# Altium PCB PMS.PcbDoc (part 1 of 3)
Units mm, origin at the board's own origin, x right, y up, seen from the top; angles counter-clockwise.
Board outline 23.9 x 83.5 mm, 4 copper layers (Top Layer, Mid Layer 1, Mid Layer 2, Bottom Layer), stack 0.77 mm thick; 91 components, 62 nets, 411 pads, 218 vias.
Unrouted connection lines stored in the file: 98.
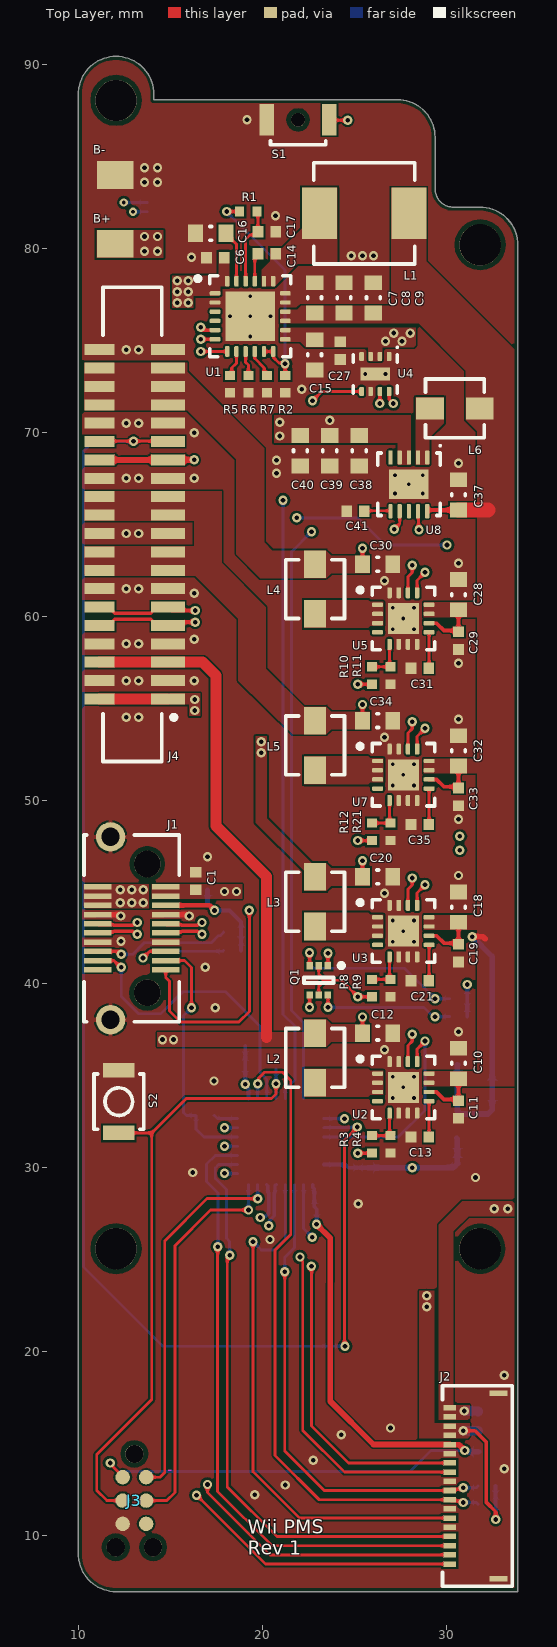
[diagram p0: Top Layer view]
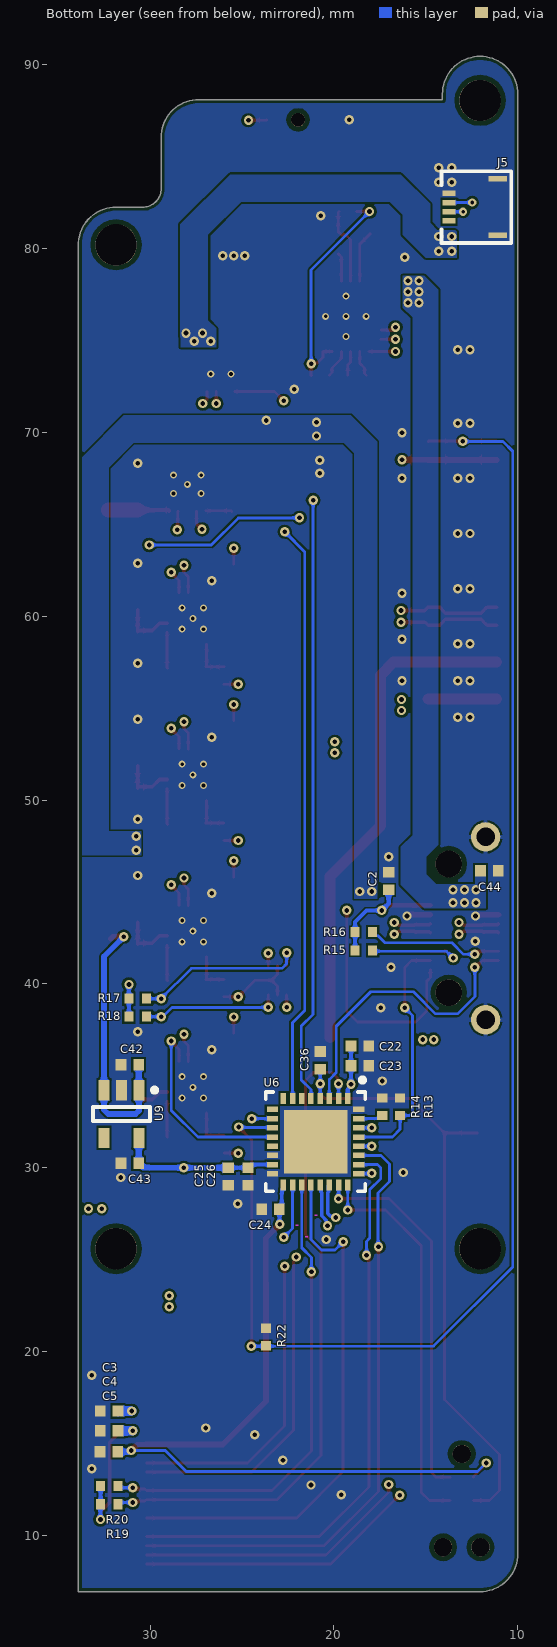
[diagram p1: Bottom Layer view, seen from below]
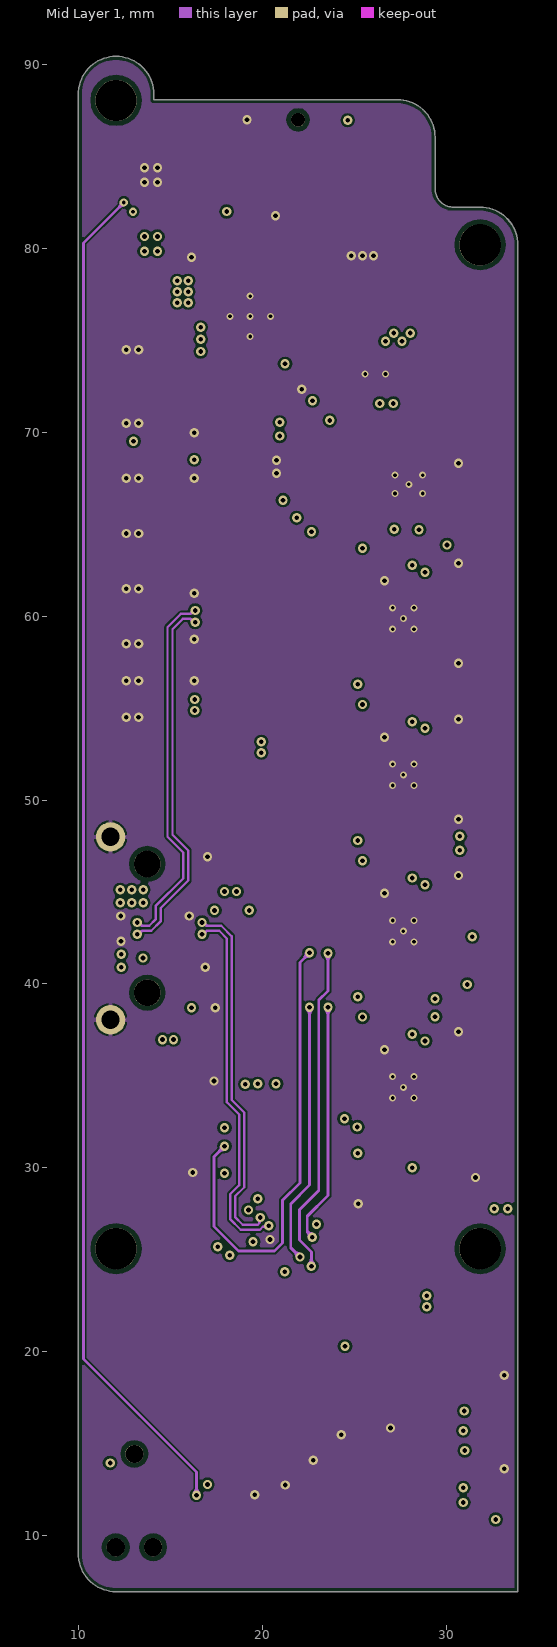
[diagram p2: Mid Layer 1]
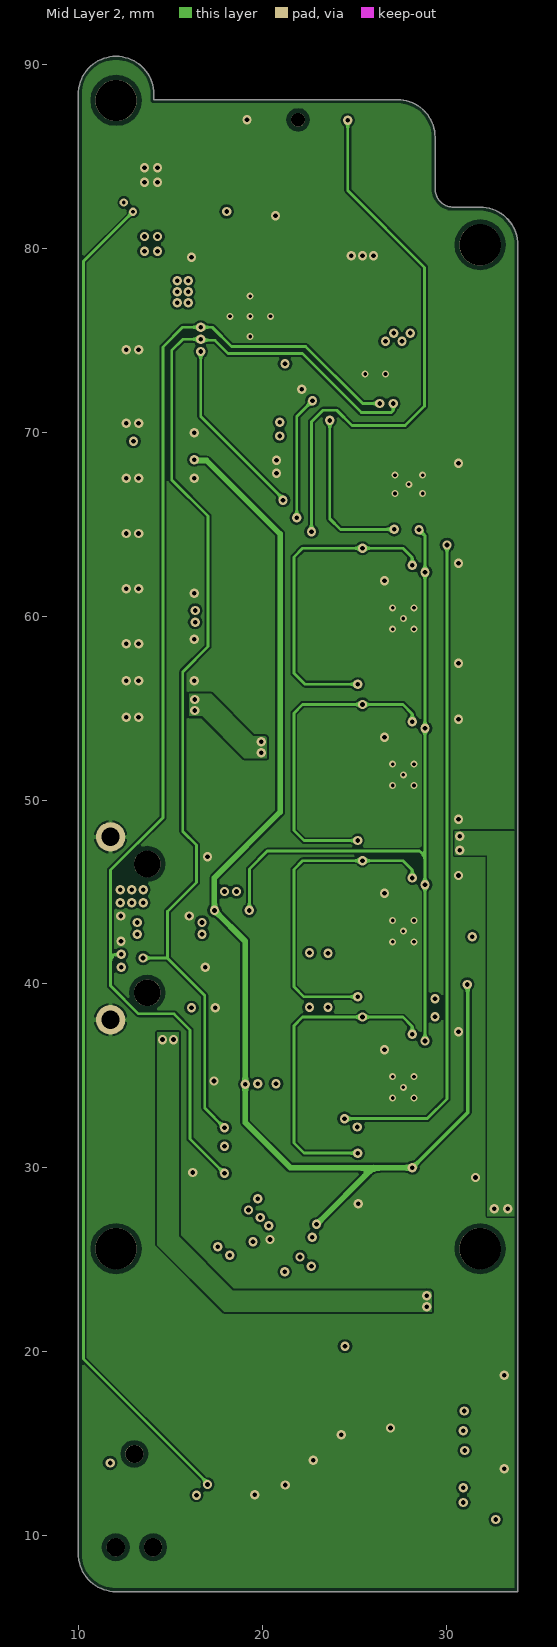
[diagram p3: Mid Layer 2]
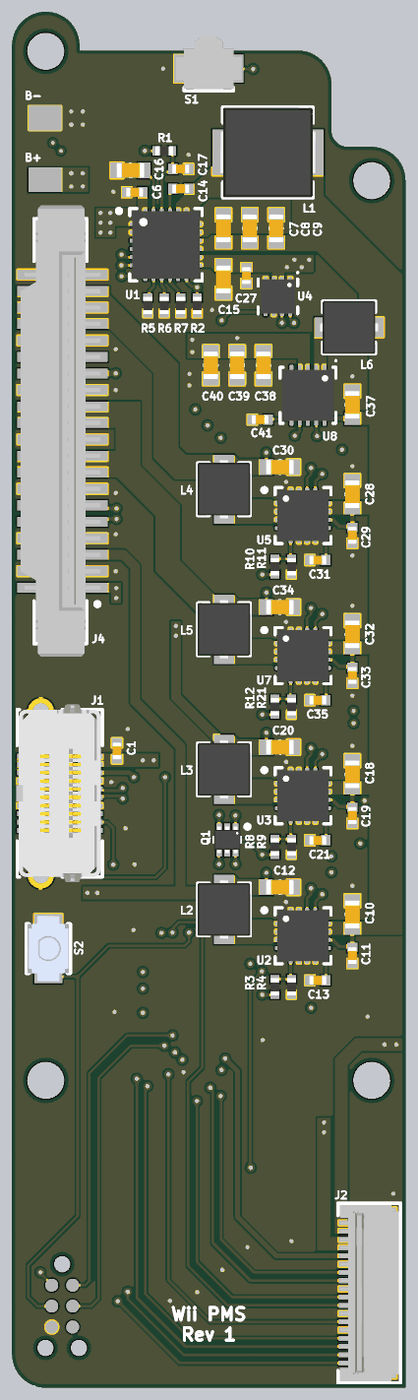
[diagram p5: 3D render of the assembled board from above, using the file's embedded part models]
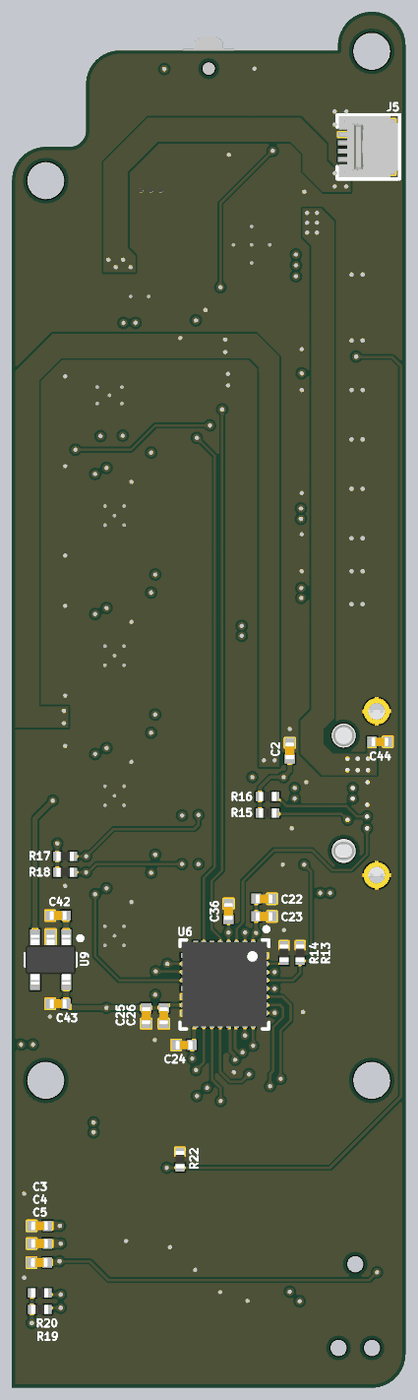
[diagram p6: 3D render of the assembled board from below, using the file's embedded part models]

## Layer stack, top to bottom
Top Solder: solder mask 0.0127, Solder Resist, Dk 3.8
Top Layer: signal copper 0.035
Dielectric 1: prepreg 0.2, 7628, Dk 4.6
Mid Layer 1: signal copper 0.0175
Core: core 0.265, FR-4, Dk 4.5
Mid Layer 2: signal copper 0.0175
Dielectric 2: prepreg 0.2, 7628, Dk 4.6
Bottom Layer: signal copper 0.035
Bottom Solder: solder mask 0.0127, Solder Resist, Dk 3.8

## Board outline
10,9 10,88.4 cw(c12.05,88.4) 12.05,90.45 cw(c12.05,88.4) 14.1,88.4 14.1,88.1 27.35,88.1 cw(c27.35,86.05) 29.4,86.05 29.4,83.25 ccw(c30.4,83.25) 30.4,82.25 31.85,82.25 cw(c31.85,80.2) 33.9,80.2 33.9,6.95 12.05,6.95 cw(c12.05,9)

## Design rules (kind name [scope] priority, off if disabled: settings)
BoardOutlineClearance [All] p1: gap=0.2 ignorepadtopadclearanceinfootprint=FALSE
Clearance [All] p1: gap=0.102 ignorepadtopadclearanceinfootprint=FALSE except(0.127: Arc-Via Track-Via SMDPad-Via THPad-Via Via-Via Via-Fill Via-Poly Via-Region Via-Text; 0.25: Arc-Hole Track-Hole SMDPad-Hole THPad-Hole Via-Hole Fill-Hole Poly-Hole Region-Hole Text-Hole)
ComponentClearance [All] p1: gap=0.102 collisioncheckmode=3 verticalgap=0.102 showdistances=TRUE
DiffPairsRouting DiffPairsRouting_USB [InDifferentialPair('MCU_DATA') OR InDifferentialPair('WII_DATA')] p1: maxlimit=0.254 minlimit=0.127 mostfreqgap=0.145 toplayer_prefgap=0.127 toplayer_minwidth=0.189 toplayer_maxwidth=0.381 toplayer_prefwidth=0.189 midlayer1_mingap=0.145 midlayer1_minwidth=0.127 midlayer1_maxwidth=0.381 midlayer1_prefwidth=0.127 midlayer2_mingap=0.145 midlayer2_minwidth=0.127 midlayer2_maxwidth=0.381 midlayer2_prefwidth=0.127 bottomlayer_prefgap=0.127 bottomlayer_minwidth=0.189 bottomlayer_maxwidth=0.381 bottomlayer_prefwidth=0.189 impedanceprofiledriven=TRUE impedanceprofileid={65FA5541-1460-4D6F-89CA-6EE92A77B4F4} impedanceprofilevalue=90.000000 maxuncoupledlength=12.7
DiffPairsRouting [All] p2: maxlimit=0.102 minlimit=0.102 mostfreqgap=0.102 toplayer_minwidth=0.102 toplayer_maxwidth=1816.048 toplayer_prefwidth=0.102 midlayer1_minwidth=0.102 midlayer1_maxwidth=1816.048 midlayer1_prefwidth=0.102 midlayer2_minwidth=0.102 midlayer2_maxwidth=1816.048 midlayer2_prefwidth=0.102 bottomlayer_minwidth=0.102 bottomlayer_maxwidth=1816.048 bottomlayer_prefwidth=0.102 maxuncoupledlength=12.7
Height [All] p1: minheight=0 maxheight=1816.048 prefheight=12.7
HoleSize [All] p1: absolutevalues=TRUE maxlimit=6.3 minlimit=0.2 maxpercent=80.000 minpercent=20.000
HoleToHoleClearance [All] p1: gap=0.25 allowstackedmicrovias=FALSE
MinimumAnnularRing [All] p1: minimumring=0.076
MinimumSolderMaskSliver [All] p1: minsoldermaskwidth=0
PlaneClearance [All] p1: clearance=0.102
PlaneConnect PlaneConnectPowerPads [InPadClass('PowerPads')] p1: planeconnectstyle=Direct reliefexpansion=0.508 reliefentries=4 reliefconductorwidth=0.254 reliefairgap=0.254
PlaneConnect [All] p2: pad.planeconnectstyle=Relief pad.reliefexpansion=0.3 pad.reliefentries=4 pad.reliefconductorwidth=0.102 pad.reliefairgap=0.102 via.planeconnectstyle=Direct via.reliefexpansion=0.3 via.reliefentries=4 via.reliefconductorwidth=0.127 via.reliefairgap=0.127
PolygonConnect PolygonConnect_PowerPads [All vs InComponent('J1') OR InComponent('U2') OR InComponent('U3') OR InComponent('U5') OR InComponent('U8') OR InComponent('U8') OR InComponent('U1') OR InComponent('J4')] p1 off: thpad.connectstyle=Relief thpad.reliefconductorwidth=0.254 thpad.reliefentries=4 thpad.polygonreliefangle="90 Angle" thpad.airgapwidth=0.254 smdpad.connectstyle=Direct smdpad.reliefconductorwidth=0.254 smdpad.reliefentries=4 smdpad.polygonreliefangle="90 Angle" smdpad.airgapwidth=0.254 via.connectstyle=Direct via.reliefconductorwidth=0.254 via.reliefentries=4 via.polygonreliefangle="90 Angle" via.airgapwidth=0.254
PolygonConnect PolygonConnect_Relief [All vs InNet('GND')] p2 off: connectstyle=Relief reliefconductorwidth=0.254 reliefentries=4 polygonreliefangle="90 Angle" airgapwidth=0.254
PolygonConnect [All] p3: thpad.connectstyle=Relief thpad.reliefconductorwidth=0.254 thpad.reliefentries=4 thpad.polygonreliefangle="90 Angle" thpad.airgapwidth=0.102 smdpad.connectstyle=Direct smdpad.reliefconductorwidth=0.254 smdpad.reliefentries=4 smdpad.polygonreliefangle="90 Angle" smdpad.airgapwidth=0.102 via.connectstyle=Direct via.reliefconductorwidth=0.127 via.reliefentries=4 via.polygonreliefangle="90 Angle" via.airgapwidth=0.127
RoutingVias [All] p1: holewidth=0.2 width=0.45 viastyle="Through Hole" minholewidth=0.2 minwidth=0.45 maxholewidth=6.3 maxwidth=6.55
SilkToSilkClearance [All] p1: silktosilkclearance=0
SilkToSolderMaskClearance [IsPad] p1: minsilkscreentomaskgap=0.102 clearancetoexposedcopper=TRUE
SolderMaskExpansion SolderMaskExpansion_Via [IsVia] p1: expansion=0.102 istentingtop=TRUE
SolderMaskExpansion [All] p2: expansion=0.075 istentingtop=FALSE
Width [All] p1: maxlimit=1816.048 minlimit=0.102 preferedwidth=0.102
20 further rules are at their usual default settings.

## Classes and differential pairs
polygon class Direct: 5V0_L01_P113
component class STM32: C22 C23 C24 C25 C26 C36 R13 R14 U6
component class MAX: C27 U4
component class BQ: C6 C7 C8 C9 C14 C15 C16 C17 L1 R1 R2 R5 R6 R7 U1
component class 3V3_AO: C42 C43 U9
component class 1V0: C32 C33 C34 C35 L5 R12 R21 U7
component class 5V0: C37 C38 C39 C40 C41 L6 U8
component class 1V15: C28 C29 C30 C31 L4 R10 R11 U5
component class 1V8: C18 C19 C20 C21 L3 R8 R9 U3
component class 3V3: C10 C11 C12 C13 L2 R3 R4 U2
differential pair WII_DATA: +WII_DATA_P -WII_DATA_N
differential pair MCU_DATA: +MCU_DATA_P -MCU_DATA_N

## Components (designator, comment, footprint, x,y, rotation, side; value= is the part's Value field where it differs from the comment)
B+ "Test Point" TP_RECTANGULAR_1.5X2MM 12,80.25 r90 top (schematic designator TP6)
B- "Test Point" TP_RECTANGULAR_1.5X2MM 12,84 r90 top (schematic designator TP7)
C1 "Capacitor" CAPC1005X06N 16.375,45.6 r270 top value=1uF
C2 "Capacitor" CAPC1005X06N 17.025,45.6 r270 bottom value=0.1uF
C3 "Capacitor" CAPC1005X06N 32.225,16.775 r180 bottom value=1uF
C4 "Capacitor" CAPC1005X06N 32.225,15.7 r180 bottom value=1uF
C5 "Capacitor" CAPC1005X06N 32.24,14.55 r180 bottom value=0.1uF
C6 "Capacitor" CAPC1005X06N 17.45,79.5 r0 top value=1uF
C7 "Capacitor" CAPC1608X09N 22.846,77.312 r270 top value=10uF
C8 "Capacitor" CAPC1608X09N 24.446,77.312 r270 top value=10uF
C9 "Capacitor" CAPC1608X09N 26.046,77.312 r270 top value=10uF
C10 "Capacitor" CAPC1608X09N 30.675,35.675 r270 top value=10uF
C11 "Capacitor" CAPC1005X06N 30.675,33.175 r90 top value=0.1uF
C12 "Capacitor" CAPC1608X09N 26.275,37.325 r180 top value=22uF
C13 "Capacitor" CAPC1005X06N 28.575,31.675 r0 top value=3300pF
C14 "Capacitor" CAPC1005X06N 20.247,79.712 r0 top value=47nF
C15 "Capacitor" CAPC1608X09N 22.846,74.212 r90 top value=10uF
C16 "Capacitor" CAPC1608X09N 17.2,80.825 r180 top value=6.8uF
C17 "Capacitor" CAPC1005X06N 20.247,80.912 r0 top value=4.7uF
C18 "Capacitor" CAPC1608X09N 30.675,44.175 r270 top value=10uF
C19 "Capacitor" CAPC1005X06N 30.675,41.675 r90 top value=0.1uF
C20 "Capacitor" CAPC1608X09N 26.275,45.825 r180 top value=22uF
C21 "Capacitor" CAPC1005X06N 28.575,40.175 r0 top value=3300pF
C22 "Capacitor" CAPC1005X06N 18.59,36.625 r0 bottom value=4.7uF
C23 "Capacitor" CAPC1005X06N 18.59,35.55 r0 bottom value=0.1uF
C24 "Capacitor" CAPC1005X06N 23.45,27.75 r180 bottom value=0.1uF
C25 "Capacitor" CAPC1005X06N 25.75,29.525 r90 bottom value=1uF
C26 "Capacitor" CAPC1005X06N 24.675,29.525 r90 bottom value=10nF
C27 "Capacitor" CAPC1005X06N 24.24,74.441 r90 top value=0.1uF
C28 "Capacitor" CAPC1608X09N 30.675,61.175 r270 top value=10uF
C29 "Capacitor" CAPC1005X06N 30.675,58.675 r90 top value=0.1uF
C30 "Capacitor" CAPC1608X09N 26.275,62.825 r180 top value=22uF
C31 "Capacitor" CAPC1005X06N 28.575,57.175 r0 top value=3300pF
C32 "Capacitor" CAPC1608X09N 30.675,52.675 r270 top value=10uF
C33 "Capacitor" CAPC1005X06N 30.675,50.175 r90 top value=0.1uF
C34 "Capacitor" CAPC1608X09N 26.275,54.325 r180 top value=22uF
C35 "Capacitor" CAPC1005X06N 28.575,48.675 r0 top value=3300pF
C36 "Capacitor" CAPC1005X06N 20.75,35.85 r270 bottom value=0.1uF
C37 "Capacitor" CAPC1608X09N 30.675,66.6 r270 top value=22uF
C38 "Capacitor" CAPC1608X09N 25.275,69 r90 top value=22uF
C39 "Capacitor" CAPC1608X09N 23.675,69 r90 top value=22uF
C40 "Capacitor" CAPC1608X09N 22.075,69 r90 top value=22uF
C41 "Capacitor" CAPC1005X06N 25.075,65.7 r0 top value=10nF
C42 "Capacitor" CAPC1005X06N 31.1,35.6 r180 bottom value=1uF
C43 "Capacitor" CAPC1005X06N 31.1,30.25 r180 bottom value=1uF
C44 "Capacitor" CAPC1005X06N 11.55,46.15 r0 bottom value=1uF
J1 "LSHM-110-04.0-L-DV-A-S-K-TR" LSHM-110-04.0-L-DV-A-S 12.9,43.025 r90 top
J2 "5034801800" 5034801800 31.7,12.7 r90 top
J3 "TC2030-NL" TC2030-NL 13.048,11.903 r270 top
J4 "2-1734248-0" 2-1734248-0 12.938,65 r270 top
J5 "5034800400" 5034800400 12.25,82.25 r90 bottom
L1 "IHLP2020CZER2R2M11" INDM5252X30N 25.546,81.912 r0 top
L2 "IHLP1212BZER2R2M11" INDM3030X20N 22.875,35.975 r90 top
L3 "IHLP1212BZER2R2M11" INDM3030X20N 22.875,44.475 r90 top
L4 "IHLP1212BZER2R2M11" INDM3030X20N 22.875,61.475 r90 top
L5 "IHLP1212BZER2R2M11" INDM3030X20N 22.875,52.975 r90 top
L6 "IHLP1212BZER1R0M11" INDM3030X20N 30.475,71.3 r180 top
Q1 "EM6K34T2CR" SOTFL50P160X50-6N 23.075,40.2 r270 top
R1 "Resistor" RESC1005X04N 19.246,82.012 r0 top value=10k
R2 "Resistor" RESC1005X04N 21.25,72.625 r270 top value=10k
R3 "Resistor" RESC1005X04N 25.975,31.275 r270 top value=324k
R4 "Resistor" RESC1005X04N 26.975,31.275 r90 top value=100k
R5 "Resistor" RESC1005X04N 18.25,72.625 r90 top value=10k
R6 "Resistor" RESC1005X04N 19.25,72.625 r90 top value=10k
R7 "Resistor" RESC1005X04N 20.25,72.625 r90 top value=165
R8 "Resistor" RESC1005X04N 25.975,39.775 r270 top value=127k
R9 "Resistor" RESC1005X04N 26.975,39.775 r90 top value=100k
R10 "Resistor" RESC1005X04N 25.975,56.775 r270 top value=45.3k
R11 "Resistor" RESC1005X04N 26.975,56.775 r90 top value=100k
R12 "Resistor" RESC1005X04N 25.975,48.275 r270 top value=30k
R13 "Resistor" RESC1005X04N 16.4,33.325 r270 bottom value=100k
R14 "Resistor" RESC1005X04N 17.375,33.325 r270 bottom value=10k
R15 "Resistor" RESC1005X04N 18.375,41.825 r0 bottom value=4.7k
R16 "Resistor" RESC1005X04N 18.375,42.825 r0 bottom value=4.7k
R17 "Resistor" RESC1005X04N 30.675,39.2 r0 bottom value=4.7k
R18 "Resistor" RESC1005X04N 30.675,38.225 r0 bottom value=4.7k
R19 "Resistor" RESC1005X04N 32.215,11.7 r0 bottom value=4.7k
R20 "Resistor" RESC1005X04N 32.215,12.7 r0 bottom value=4.7k
R21 "Resistor" RESC1005X04N 26.975,48.275 r90 top value=100k
R22 "Resistor" RESC1005X04N 23.7,20.8 r90 bottom value=10k
S1 "B3U-3000P-B" B3U-3000P-B 21.95,87 r0 top
S2 "B3U-1000P" B3U-1000P 12.2,33.6 r90 top
U1 "BQ24292IRGER" QFN50P400X400X100_HS-25N 19.346,76.312 r0 top
U2 "TPS62130ARGTR" QFN50P300X300X100_HS-17N 27.675,34.375 r0 top
U3 "TPS62130ARGTR" QFN50P300X300X100_HS-17N 27.675,42.875 r0 top
U4 "MAX17048G+T10" SON50P200X80_HS-9N 26.15,73.175 r270 top
U5 "TPS62130ARGTR" QFN50P300X300X100_HS-17N 27.675,59.875 r0 top
U6 "STM32G431KBU6" QFN50P500X500X60_HS-33N 21,31.425 r270 bottom
U7 "TPS62130ARGTR" QFN50P300X300X100_HS-17N 27.675,51.375 r0 top
U8 "TPS61232DRCR" SON50P300X100_HS-11N 27.975,67.175 r270 top
U9 "TLV75533PDBVR" SOT95P280X145-5N 31.555,32.925 r270 bottom

## Footprints (in the part's own frame and the unit in brackets; to place one, negate y for a bottom-side part, rotate by r counter-clockwise, add the part's x,y. Pads: shape width x height; smd on the part's side, far side on the other; paste and mask are expansions set on the pad)
2-1734248-0 [mm] "CONN FPC VERT 20POS 1.00MM SMD"
  rect 0.6x1.65 smd: 1(9.5,-1.788) 2(8.5,-1.788) 3(7.5,-1.788) 4(6.5,-1.788) 5(5.5,-1.788) 6(4.5,-1.788) 7(3.5,-1.788) 8(2.5,-1.788) 9(1.5,-1.788) 10(0.5,-1.788) 11(-0.5,-1.788) 12(-1.5,-1.788) 13(-2.5,-1.788) 14(-3.5,-1.788) 15(-4.5,-1.788) 16(-5.5,-1.788) 17(-6.5,-1.788) 18(-7.5,-1.788) 19(-8.5,-1.788) 20(-9.5,-1.788)
  rect 0.6x1.85 smd: 1(9.5,1.937) 2(8.5,1.937) 3(7.5,1.937) 4(6.5,1.937) 5(5.5,1.937) 6(4.5,1.937) 7(3.5,1.937) 8(2.5,1.937) 9(1.5,1.937) 10(0.5,1.937) 11(-0.5,1.937) 12(-1.5,1.937) 13(-2.5,1.937) 14(-3.5,1.937) 15(-4.5,1.937) 16(-5.5,1.937) 17(-6.5,1.937) 18(-7.5,1.937) 19(-8.5,1.937) 20(-9.5,1.937)
  silkscreen extent -12.9,-1.6 12.9,2.38, body extent -13.7,-2.43 13.7,2.42, height 5.72
5034800400 [mm] "CONN FFC FPC 4POS 0.50MM R/A"
  rect 0.3x0.7 smd: 1(-0.75,1.5) 2(-0.25,1.5) 3(0.25,1.5) 4(0.75,1.5)
  rect 0.3x1 smd: SHIELD(-1.54,-1.15) SHIELD(1.54,-1.15)
  silkscreen extent -1.95,-1.9 1.95,1.9, body extent -1.85,-1.8 1.85,1.8, height 1.88
5034801800 [mm] "CONN FFC FPC 18POS 0.50MM R/A"
  rect 0.3x0.7 smd: 1(-4.25,1.5) 2(-3.75,1.5) 3(-3.25,1.5) 4(-2.75,1.5) 5(-2.25,1.5) 6(-1.75,1.5) 7(-1.25,1.5) 8(-0.75,1.5) 9(-0.25,1.5) 10(0.25,1.5) 11(0.75,1.5) 12(1.25,1.5) 13(1.75,1.5) 14(2.25,1.5) 15(2.75,1.5) 16(3.25,1.5) 17(3.75,1.5) 18(4.25,1.5)
  rect 0.3x1 smd: SHIELD(-5.04,-1.15) SHIELD(5.04,-1.15)
  silkscreen extent -5.45,-1.9 5.45,1.9, body extent -5.35,-1.8 5.35,1.8, height 1.88
B3U-1000P [mm] "SWITCH TACTILE SPST-NO 0.05A 12V"
  rect 0.8x1.7 smd: 1(-1.7,0) 2(1.7,0)
  silkscreen extent -1.5,-1.35 1.5,1.35, body extent -2,-1.26 2,1.24, height 1.6
B3U-3000P-B [mm] "SWITCH TACTILE SPST-NO 0.05A 12V"
  rect 0.8x1.7 smd: 1(-1.7,0) 2(1.7,0)
  round 0.75 hole 0.75 unplated: ""(0,0)
  silkscreen extent -1.5,-1.35 1.5,-1.15, body extent -2,-1.25 2,1.95, height 1.2
CAPC1005X06N [mm] "Chip Capacitor, 2-Leads, Body 1.00x0.50mm, IPC Medium Density"
  rect 0.58x0.62 smd: 1(-0.48,0) 2(0.48,0)
  body extent -0.53,-0.28 0.53,0.27, height 0.55
CAPC1608X09N [mm] "Chip Capacitor, 2-Leads, Body 1.60x0.80mm, IPC Medium Density"
  rect 0.8x0.95 smd: 1(-0.825,0) 2(0.825,0)
  silkscreen extent -0.05,-0.38 0.05,0.38, body extent -0.85,-0.45 0.85,0.45, height 0.9
INDM3030X20N [mm] "Molded Inductor, 2-Leads, Body 3.00x3.00mm, IPC Medium Density"
  rect 1.5x1.2 smd: 1(-1.35,0) 2(1.35,0)
  silkscreen extent -1.6,-1.6 1.6,1.6, body extent -1.82,-1.6 1.82,1.6, height 2
INDM5252X30N [mm] "Molded Inductor, 2-Leads, Body 5.18x5.18mm, IPC Medium Density"
  rect 1.905x2.79 smd: 1(-2.425,0) 2(2.426,0)
  silkscreen extent -2.75,-2.75 2.75,2.75, body extent -2.94,-2.72 2.94,2.72, height 3
LSHM-110-04.0-L-DV-A-S [mm] "CONN SELF-MATE 20POS SMD GOLD"
  rect 0.3x1.5 smd: 1(2.25,-1.85) 2(2.25,1.85) 3(1.75,-1.85) 4(1.75,1.85) 5(1.25,-1.85) 6(1.25,1.85) 7(0.75,-1.85) 8(0.75,1.85) 9(0.25,-1.85) 10(0.25,1.85) 11(-0.25,-1.85) 12(-0.25,1.85) 13(-0.75,-1.85) 14(-0.75,1.85) 15(-1.25,-1.85) 16(-1.25,1.85) 17(-1.75,-1.85) 18(-1.75,1.85) 19(-2.25,-1.85) 20(-2.25,1.85)
  round 1.6 hole 1: SHIELD(-4.975,1.15) SHIELD(4.975,1.15)
  round 1.45 hole 1.45 unplated: ""(-3.5,-0.85) ""(3.5,-0.85)
  silkscreen extent -5.07,-2.59 5.07,2.59, body extent -5.4,-2.49 5.4,2.64, height 5.43
QFN50P300X300X100_HS-17N [mm] "QFN, 16-Leads, Body 3.00x3.00mm, Pitch 0.50mm, Thermal Pad 1.68x1.68mm, IPC Medium Density"
  rrect50% 0.6x0.24 smd: 1(-1.4,0.75) 2(-1.4,0.25) 3(-1.4,-0.25) 4(-1.4,-0.75) 9(1.4,-0.75) 10(1.4,-0.25) 11(1.4,0.25) 12(1.4,0.75)
  rrect50% 0.24x0.6 smd: 5(-0.75,-1.4) 6(-0.25,-1.4) 7(0.25,-1.4) 8(0.75,-1.4) 13(0.75,1.4) 14(0.25,1.4) 15(-0.25,1.4) 16(-0.75,1.4)
  rect 1.68x1.68 smd: 17(0,0)
  silkscreen extent -2.47,-1.7 1.7,1.7, body extent -1.55,-1.55 1.55,1.55, height 1
QFN50P400X400X100_HS-25N [mm] "QFN, 24-Leads, Body 4.00x4.00mm, Pitch 0.50mm, Thermal Pad 2.70x2.70mm, IPC Medium Density"
  rrect50% 0.58x0.24 smd: 1(-1.913,1.25) 2(-1.913,0.75) 3(-1.913,0.25) 4(-1.913,-0.25) 5(-1.913,-0.75) 6(-1.913,-1.25) 13(1.913,-1.25) 14(1.913,-0.75) 15(1.913,-0.25) 16(1.913,0.25) 17(1.913,0.75) 18(1.913,1.25)
  rrect50% 0.24x0.58 smd: 7(-1.25,-1.913) 8(-0.75,-1.913) 9(-0.25,-1.913) 10(0.25,-1.913) 11(0.75,-1.913) 12(1.25,-1.913) 19(1.25,1.913) 20(0.75,1.913) 21(0.25,1.913) 22(-0.25,1.913) 23(-0.75,1.913) 24(-1.25,1.913)
  rect 2.7x2.7 smd: 25(0,0)
  silkscreen extent -2.97,-2.2 2.2,2.2, body extent -2.05,-2.05 2.05,2.05, height 1
QFN50P500X500X60_HS-33N [mm] "QFN, 32-Leads, Body 5.00x5.00mm, Pitch 0.50mm, Thermal Pad 3.45x3.45mm, IPC Medium Density"
  rect 0.6x0.3 smd: 1(-2.35,1.75) 2(-2.35,1.25) 3(-2.35,0.75) 4(-2.35,0.25) 5(-2.35,-0.25) 6(-2.35,-0.75) 7(-2.35,-1.25) 8(-2.35,-1.75) 17(2.35,-1.75) 18(2.35,-1.25) 19(2.35,-0.75) 20(2.35,-0.25) 21(2.35,0.25) 22(2.35,0.75) 23(2.35,1.25) 24(2.35,1.75)
  rect 0.3x0.6 smd: 9(-1.75,-2.35) 10(-1.25,-2.35) 11(-0.75,-2.35) 12(-0.25,-2.35) 13(0.25,-2.35) 14(0.75,-2.35) 15(1.25,-2.35) 16(1.75,-2.35) 25(1.75,2.35) 26(1.25,2.35) 27(0.75,2.35) 28(0.25,2.35) 29(-0.25,2.35) 30(-0.75,2.35) 31(-1.25,2.35) 32(-1.75,2.35)
  rect 3.45x3.45 smd: 33(0,0)
  silkscreen extent -3.47,-2.7 2.7,2.7, body extent -2.55,-2.55 2.55,2.55, height 0.6
RESC1005X04N [mm] "Chip Resistor, 2-Leads, Body 1.00x0.50mm, IPC Medium Density"
  rect 0.5x0.55 smd: 1(-0.475,0) 2(0.475,0)
  body extent -0.52,-0.27 0.53,0.28, height 0.4
SON50P200X80_HS-9N [mm] "SON, 8-Leads, Body 2.00x2.00mm, Pitch 0.50mm, Thermal Pad 1.60x0.69mm, IPC Medium Density"
  rrect50% 0.5x0.25 smd: 1(-0.95,0.75) 2(-0.95,0.25) 3(-0.95,-0.25) 4(-0.95,-0.75) 5(0.95,-0.75) 6(0.95,-0.25) 7(0.95,0.25) 8(0.95,0.75)
  rect 0.69x1.6 smd: 9(0,0)
  silkscreen extent -1.5,-1.2 1.05,1.25, body extent -1.05,-1.05 1.05,1.05, height 0.8
SON50P300X100_HS-11N [mm] "SON, 10-Leads, Body 3.00x3.00mm, Pitch 0.50mm, Thermal Pad 2.15x1.49mm, IPC Medium Density"
  rrect50% 0.775x0.23 smd: 1(-1.462,1) 2(-1.462,0.5) 3(-1.462,0) 4(-1.462,-0.5) 5(-1.462,-1) 6(1.463,-1) 7(1.463,-0.5) 8(1.463,0) 9(1.463,0.5) 10(1.463,1)
  rect 1.6x2.15 smd: 11(0,0)
  silkscreen extent -2.15,-1.7 1.7,1.75, body extent -1.55,-1.55 1.55,1.55, height 1
SOT95P280X145-5N [mm] "SOT23, 5-Leads, Body 2.90x2.80mm, Pitch 0.95mm, IPC Medium Density"
  rect 1.1x0.6 smd: 1(-1.3,0.95) 2(-1.3,0) 3(-1.3,-0.95) 4(1.3,-0.95) 5(1.3,0.95)
  silkscreen extent -1.42,-1.55 0.38,1.92, body extent -1.5,-1.53 1.5,1.53, height 1.45
SOTFL50P160X50-6N [mm] "SOTFL, 6-Leads, Body 1.60x1.60mm, Pitch 0.50mm, IPC Medium Density"
  rect 0.4x0.35 smd: 1(-0.8,0.5) 2(-0.8,0) 3(-0.8,-0.5) 4(0.8,-0.5) 5(0.8,0) 6(0.8,0.5)
  silkscreen extent -0.92,-0.8 0.15,1.35, body extent -0.8,-0.8 0.8,0.8, height 0.5
TC2030-NL [mil] "6-Pin Tag-Connect"
  round 30.98 smd: 1(-50,-25) 2(-50,25) 3(0,-25) 4(0,25) 5(50,-25) 6(50,25)
  round 39.02 hole 39.02 unplated: ""(-100,0) ""(100,40) ""(100,-40)
  Top Layer region: -118.11,157.48
TP_RECTANGULAR_1.5X2MM [mm]
  rect 1.5x2 smd mask+0.05: 1(0,0)

## Part data
B+ B-: "General purpose test point"
C1 C2 C3 C4 C5 C6 C11 C19 C23 C24 C25 C27 C29 C33 C36 C42 C43 C44: "General purpose capacitor", Package=0402, Rated Voltage=25V
C7 C8 C9 C10 C12 C15 C18 C20 C28 C30 C32 C34 C37 C38 C39 C40: "General purpose capacitor", Package=0603, Rated Voltage=10V
C13 C14 C21 C26 C31 C35 C41: "General purpose capacitor", Package=0402, Rated Voltage=50V
C16: "General purpose capacitor", Package=0603, Rated Voltage=25V
C17 C22: "General purpose capacitor", Package=0402, Rated Voltage=10V
J1: "HERMAPHRODITIC 0.50MM SMD 20POS 4MM", Manufacturer=Samtec, Manufacturer Part Number=LSHM-110-04.0-L-DV-A-S-K-TR, Pricing 1="625=3.77400 (USD)", RoHS=No, Supplier 1=Digi-Key
J2: "CONN FFC FPC 18POS 0.50MM R/A", Current Rating=500mA, Flammability Rating="UL94 V-0", Housing Color=White, Manufacturer=Molex, Max Operating Temperature=85°C, Max Voltage Rating (AC)=50V, Min Operating Temperature=-40°C, Package Quantity=3000, Actuator Material=Nylon,Glass,Polyamide, Category="FFC / FPC", ComponentLink1Description=https://datasheet.ciiva.com/671/5034800400-sd-671136.pdf?src-supplier=Digi-Key, ComponentLink1URL=https://datasheet.ciiva.com/671/5034800400-sd-671136.pdf?src-supplier=Digi-Key, ComponentLink2Description=https://datasheet.ciiva.com/5137/5034801800-ffc-fpc-connectors-179548-5137672.pdf?src-supplier=Mouser, ComponentLink2URL=https://datasheet.ciiva.com/5137/5034801800-ffc-fpc-connectors-179548-5137672.pdf?src-supplier=Mouser, ComponentLink3Description=https://datasheet.ciiva.com/10366/5034801800-ffc-fpc-connectors-10366583.pdf?src-supplier=Avnet, ComponentLink3URL=https://datasheet.ciiva.com/10366/5034801800-ffc-fpc-connectors-10366583.pdf?src-supplier=Avnet, Contact Location=Dual, Contact Material=Bronze,Gold, Contact Plating=Gold,Tin, Depth=4mm, ELV=Compliant, Gender=Receptacle, Halogen Free="Low Halogen", Housing Material=Polymer, Length=10.7mm, Manufacturer Part Number=5034801800, Material=Bronze, Mating Cycles=10, Number of Circuits=18, Number of Contacts=18, Number of Positions=18, Number of Rows=1, Orientation="Right Angle", Packaging="Tape and Reel", Pitch=0.5mm, Pricing 1="1=1.44000, 10=1.31000, 25=1.23000, 50=1.17660, 100=1.12310, 250=1.01616, 500=0.93594, 1000=0.80223 (USD)", Radiation Hardening=No, REACH SVHC=Unknown, RoHS=Yes, Stackable=No, Stock 1=15433, Supplier 1=Digi-Key, Termination=SMD/SMT, Voltage Rating=50V, Voltage Rating (AC)=50V, Wire/Cable Type=Straight
J3: "6-Pin No-Legs Tag-Connect Plug-of-Nails™ Cable with Ribbon Connector"
J4: "FFC/FPC CONNECTOR, RECEPTACLE 20POS 1ROW", Contact Current Rating=1A, Flammability Rating="UL94 V-0", Housing Color=Black, Manufacturer="TE Connectivity", Max Operating Temperature=185°C, Min Operating Temperature=-4°C, Package Quantity=1000, Voltage Rating=125V, Category="FFC / FPC", ComponentLink1Description=https://datasheet.ciiva.com/1446/1652249-1446928.pdf?src-supplier=Farnell, ComponentLink1URL=https://datasheet.ciiva.com/1446/1652249-1446928.pdf?src-supplier=Farnell, ComponentLink2Description=https://datasheet.ciiva.com/43513/eng-ds-1-1773440-6-0506-43513462.pdf?src-supplier=Onlinecomponents.com, ComponentLink2URL=https://datasheet.ciiva.com/43513/eng-ds-1-1773440-6-0506-43513462.pdf?src-supplier=Onlinecomponents.com, ComponentLink3Description=https://datasheet.ciiva.com/669/eng-cd-1734248-e1-669771.pdf?src-supplier=Digi-Key, ComponentLink3URL=https://datasheet.ciiva.com/669/eng-cd-1734248-e1-669771.pdf?src-supplier=Digi-Key, ComponentLink4Description=https://datasheet.ciiva.com/669/eng-cd-1734248-e1-669772.pdf?src-supplier=Digi-Key, ComponentLink4URL=https://datasheet.ciiva.com/669/eng-cd-1734248-e1-669772.pdf?src-supplier=Digi-Key, ComponentLink5Description=https://datasheet.ciiva.com/669/eng-cd-1734248-e1-669773.pdf?src-supplier=Digi-Key, ComponentLink5URL=https://datasheet.ciiva.com/669/eng-cd-1734248-e1-669773.pdf?src-supplier=Digi-Key, ComponentLink6Description=https://datasheet.ciiva.com/1437/586796-1437710.pdf?src-supplier=Element14, ComponentLink6URL=https://datasheet.ciiva.com/1437/586796-1437710.pdf?src-supplier=Element14, Connector System=Flex-to-Board, Connector Type=Receptacle,Connector,Socket, Contact Location=Bottom, Contact Material=Bronze, Contact Plating=Gold, Current Rating=1A, Depth=4.6mm, ELV=Compliant, Gender=Male, Height=7.7mm, Housing Material=Thermoplastic, Lead Free="Lead Free", Length=27.4mm, Manufacturer Part Number=2-1734248-0, Mating Alignment="Yes (With)", Mount="Surface Mount", Number of Contacts=20, Number of Positions=20, Number of Rows=1, Orientation=Straight, Packaging="Tape and Reel", PCB Mount Alignment="No (Without)", PCB Mount Retention=With, PCB Mounting Orientation=Vertical, Pitch=0.039inch, Pricing 1="1=1.62000, 10=1.47400, 25=1.38360, 50=1.32340, 100=1.26330, 250=1.14300, 500=1.05274 (USD)", Radiation Hardening=No, REACH SVHC=Unknown, RoHS=Yes, Sealable="No (Without)", Shielding=Unshielded, Shrouded="Yes (With)", Stock 1=651, Supplier 1=Digi-Key, Termination=SMD/SMT, Width=4.6mm, Wire/Cable Type="Flat Flex"
J5: "CONN FFC FPC 4POS 0.50MM R/A", Current Rating=500mA, Flammability Rating="UL94 V-0", Housing Color=White, Manufacturer=Molex, Max Operating Temperature=85°C, Max Voltage Rating (AC)=50V, Min Operating Temperature=-40°C, Package Quantity=1, Actuator Material=Nylon,Glass,Polyamide, Category="FFC / FPC", ComponentLink1Description=https://datasheet.ciiva.com/671/5034800400-sd-671136.pdf?src-supplier=Digi-Key, ComponentLink1URL=https://datasheet.ciiva.com/671/5034800400-sd-671136.pdf?src-supplier=Digi-Key, ComponentLink2Description=https://datasheet.ciiva.com/15249/392825034800400-ffc-fpc-nectors-15249120.pdf?src-supplier=Arrow+Europe, ComponentLink2URL=https://datasheet.ciiva.com/15249/392825034800400-ffc-fpc-nectors-15249120.pdf?src-supplier=Arrow+Europe, ComponentLink3Description=https://datasheet.ciiva.com/16658/5034800400-ffc-fpc-connectors-16658883.pdf?src-supplier=Avnet+Europe, ComponentLink3URL=https://datasheet.ciiva.com/16658/5034800400-ffc-fpc-connectors-16658883.pdf?src-supplier=Avnet+Europe, ComponentLink4Description=https://datasheet.ciiva.com/3926/135095034800400-ffc-fpc-nectors-3926214.pdf?src-supplier=Arrow, ComponentLink4URL=https://datasheet.ciiva.com/3926/135095034800400-ffc-fpc-nectors-3926214.pdf?src-supplier=Arrow, ComponentLink5Description=https://datasheet.ciiva.com/5137/5034800400-ffc-fpc-connectors-179546-5137607.pdf?src-supplier=Mouser, ComponentLink5URL=https://datasheet.ciiva.com/5137/5034800400-ffc-fpc-connectors-179546-5137607.pdf?src-supplier=Mouser, ComponentLink6Description=https://datasheet.ciiva.com/671/5034800400-sd-671137.pdf?src-supplier=Digi-Key, ComponentLink6URL=https://datasheet.ciiva.com/671/5034800400-sd-671137.pdf?src-supplier=Digi-Key, ComponentLink7Description=https://datasheet.ciiva.com/671/5034800400-sd-671138.pdf?src-supplier=Digi-Key, ComponentLink7URL=https://datasheet.ciiva.com/671/5034800400-sd-671138.pdf?src-supplier=Digi-Key, ComponentLink8Description=https://datasheet.ciiva.com/10366/5034800400-ffc-fpc-connectors-10366566.pdf?src-supplier=Avnet, ComponentLink8URL=https://datasheet.ciiva.com/10366/5034800400-ffc-fpc-connectors-10366566.pdf?src-supplier=Avnet, Contact Material=Bronze, Contact Plating=Gold, Depth=4mm, ELV=Compliant, Gender=Female, Halogen Free="Low Halogen", Housing Material=Polymer, Length=3.7mm, Manufacturer Part Number=5034800400, Material=Bronze, Mating Cycles=10, Max Voltage Rating (DC)=50V, Number of Circuits=4, Number of Contacts=4, Number of Positions=4, Number of Rows=1, Orientation="Right Angle", Packaging="Tape and Reel", Pitch=0.5mm, Pricing 1="1=0.70000, 10=0.65200, 25=0.58640, 50=0.52140, 100=0.49970, 250=0.45624, 500=0.43450, 1000=0.35846 (USD)", Radiation Hardening=No, REACH SVHC="No SVHC", RoHS=Yes, Stackable=No, Stock 1=13432, Supplier 1=Digi-Key, Termination=Solder, Voltage Rating=50V, Voltage Rating (AC)=50V, Wire/Cable Type=Straight
L1: "FIXED IND 2.2UH 6.75A 25 MOHM", Case/Package=2020, Current Rating=6.75A, DC Resistance (DCR)=25mR, Inductance=2.2uH, Inductance Tolerance=20%, Manufacturer="Vishay Dale", Max DC Current=5.5A, Max Operating Temperature=125°C, Min Operating Temperature=-55°C, Package Quantity=2000, Self Resonant Frequency=41MHz, Test Frequency=100kHz, Category="Fixed Inductors", ComponentLink1Description=https://datasheet.ciiva.com/11798/0900766b8102c930-11798352.pdf?src-supplier=RSComponents, ComponentLink1URL=https://datasheet.ciiva.com/11798/0900766b8102c930-11798352.pdf?src-supplier=RSComponents, ComponentLink2Description=https://datasheet.ciiva.com/1051/lp20cz11-1051642.pdf?src-supplier=Digi-Key, ComponentLink2URL=https://datasheet.ciiva.com/1051/lp20cz11-1051642.pdf?src-supplier=Digi-Key, ComponentLink3Description=https://datasheet.ciiva.com/1051/lp20cz11-1051643.pdf?src-supplier=Digi-Key, ComponentLink3URL=https://datasheet.ciiva.com/1051/lp20cz11-1051643.pdf?src-supplier=Digi-Key, ComponentLink4Description=https://datasheet.ciiva.com/17269/lp20cz11-17269547.pdf?src-supplier=Avnet+Europe, ComponentLink4URL=https://datasheet.ciiva.com/17269/lp20cz11-17269547.pdf?src-supplier=Avnet+Europe, ComponentLink5Description=https://datasheet.ciiva.com/1051/lp20cz11-1051644.pdf?src-supplier=Digi-Key, ComponentLink5URL=https://datasheet.ciiva.com/1051/lp20cz11-1051644.pdf?src-supplier=Digi-Key, ComponentLink6Description=https://datasheet.ciiva.com/24205/lp20cz11-24205966.pdf?src-supplier=Future+Electronics, ComponentLink6URL=https://datasheet.ciiva.com/24205/lp20cz11-24205966.pdf?src-supplier=Future+Electronics, ComponentLink7Description=https://datasheet.ciiva.com/46385/480942-46385615.pdf?src-supplier=Element14, ComponentLink7URL=https://datasheet.ciiva.com/46385/480942-46385615.pdf?src-supplier=Element14, Contact Plating=Tin, Core Material=Metal,Composite, Depth=5.43mm, Height=3mm, Height - Seated (Max)=0.118inch, Lead Free="Lead Free", Length=5.74mm, Manufacturer Part Number=IHLP2020CZER2R2M11, Military Standard=Not, Mount="Surface Mount", Packaging="Tape and Reel", Pricing 1="1=2.39000, 10=2.20800, 100=1.54560, 500=1.25120, 1000=1.14080 (USD)", Radiation Hardening=No, REACH SVHC=Unknown, RMS Current (Irms)=6.75A, RoHS=Yes, Saturation Current=5.5A, Shielding=Shielded, Stock 1=58349, Supplier 1=Digi-Key, Termination=SMD/SMT, Tolerance=20%, Width=0.204inch
L2 L3 L4 L5: "FIXED IND 2.2UH 3A 46 MOHM SMD", Case/Package=1212, Current Rating=3A, DC Resistance (DCR)=46mR, Inductance=2.2uH, Inductance Tolerance=20%, Manufacturer="Vishay Dale", Max Operating Temperature=125°C, Min Operating Temperature=-55°C, Package Quantity=3000, Saturation Current=3.3A, Self Resonant Frequency=55MHz, Test Frequency=100kHz, Category="Fixed Inductors", ComponentLink1Description=https://datasheet.ciiva.com/7290/1537140-7290128.pdf?src-supplier=Newark, ComponentLink1URL=https://datasheet.ciiva.com/7290/1537140-7290128.pdf?src-supplier=Newark, ComponentLink2Description=https://datasheet.ciiva.com/8017/1520470-8017625.pdf?src-supplier=Element14, ComponentLink2URL=https://datasheet.ciiva.com/8017/1520470-8017625.pdf?src-supplier=Element14, ComponentLink3Description=https://datasheet.ciiva.com/11798/0900766b8102b422-11798283.pdf?src-supplier=RSComponents, ComponentLink3URL=https://datasheet.ciiva.com/11798/0900766b8102b422-11798283.pdf?src-supplier=RSComponents, ComponentLink4Description=https://datasheet.ciiva.com/3866/lp12bz11-3866206.pdf?src-supplier=Arrow, ComponentLink4URL=https://datasheet.ciiva.com/3866/lp12bz11-3866206.pdf?src-supplier=Arrow, ComponentLink5Description=https://datasheet.ciiva.com/16335/lp12bz11-16335797.pdf?src-supplier=Future+Electronics, ComponentLink5URL=https://datasheet.ciiva.com/16335/lp12bz11-16335797.pdf?src-supplier=Future+Electronics, ComponentLink6Description=https://datasheet.ciiva.com/4953/lp12bz11-244380-4953990.pdf?src-supplier=Mouser, ComponentLink6URL=https://datasheet.ciiva.com/4953/lp12bz11-244380-4953990.pdf?src-supplier=Mouser, ComponentLink7Description=https://datasheet.ciiva.com/6688/lp12bz11-6688247.pdf?src-supplier=Digi-Key, ComponentLink7URL=https://datasheet.ciiva.com/6688/lp12bz11-6688247.pdf?src-supplier=Digi-Key, ComponentLink8Description=https://datasheet.ciiva.com/6688/lp12bz11-6688250.pdf?src-supplier=Digi-Key, ComponentLink8URL=https://datasheet.ciiva.com/6688/lp12bz11-6688250.pdf?src-supplier=Digi-Key, ComponentLink9Description=https://datasheet.ciiva.com/6688/lp12bz11-6688252.pdf?src-supplier=Digi-Key, ComponentLink9URL=https://datasheet.ciiva.com/6688/lp12bz11-6688252.pdf?src-supplier=Digi-Key, ComponentLink10Description=https://datasheet.ciiva.com/3081/lp12bz11-3081917.pdf?src-supplier=Avnet, ComponentLink10URL=https://datasheet.ciiva.com/3081/lp12bz11-3081917.pdf?src-supplier=Avnet, ComponentLink11Description=https://datasheet.ciiva.com/17268/lp12bz11-17268765.pdf?src-supplier=Avnet+Europe, ComponentLink11URL=https://datasheet.ciiva.com/17268/lp12bz11-17268765.pdf?src-supplier=Avnet+Europe, Contact Plating=Tin, Core Material=Metal,Composite,Ferrite, Depth=3.2mm, Height=2mm, Height - Seated (Max)=0.079inch, Lead Free="Lead Free", Length=3.6mm, Manufacturer Part Number=IHLP1212BZER2R2M11, Max DC Current=3A, Military Standard=Not, Mount="Surface Mount", Number of Pins=2, Packaging="Tape and Reel", Pricing 1="1=1.45000, 10=1.34600, 100=0.97290, 500=0.74520, 1000=0.66240 (USD)", Radiation Hardening=No, REACH SVHC=Unknown, RMS Current (Irms)=3A, RoHS=Yes, Shielding=Shielded, Stock 1=1430, Supplier 1=Digi-Key, Termination=SMD/SMT, Tolerance=20%, Width=3mm
L6: "FIXED IND 1UH 5A 24 MOHM SMD", Case Code (Imperial)=1212, Case Code (Metric)=3630, Current Rating=5A, DC Resistance (DCR)=24mR, Inductance=1uH, Inductance Tolerance=20%, Manufacturer="Vishay Dale", Max Operating Temperature=125°C, Min Operating Temperature=-55°C, Package Quantity=3000, Saturation Current=4.5A, Self Resonant Frequency=75MHz, Test Frequency=100kHz, Case/Package=1212, Category="Fixed Inductors", ComponentLink1Description=https://datasheet.ciiva.com/11798/0900766b8102b422-11798284.pdf?src-supplier=RSComponents, ComponentLink1URL=https://datasheet.ciiva.com/11798/0900766b8102b422-11798284.pdf?src-supplier=RSComponents, ComponentLink2Description=https://datasheet.ciiva.com/26821/getdatasheetpartid-180380-26821417.pdf?src-supplier=Verical, ComponentLink2URL=https://datasheet.ciiva.com/26821/getdatasheetpartid-180380-26821417.pdf?src-supplier=Verical, ComponentLink3Description=https://datasheet.ciiva.com/6688/lp12bz11-6688261.pdf?src-supplier=Digi-Key, ComponentLink3URL=https://datasheet.ciiva.com/6688/lp12bz11-6688261.pdf?src-supplier=Digi-Key, ComponentLink4Description=https://datasheet.ciiva.com/6688/lp12bz11-6688263.pdf?src-supplier=Digi-Key, ComponentLink4URL=https://datasheet.ciiva.com/6688/lp12bz11-6688263.pdf?src-supplier=Digi-Key, ComponentLink5Description=https://datasheet.ciiva.com/8017/652599-8017624.pdf?src-supplier=Element14, ComponentLink5URL=https://datasheet.ciiva.com/8017/652599-8017624.pdf?src-supplier=Element14, ComponentLink6Description=https://datasheet.ciiva.com/17268/lp12bz11-17268761.pdf?src-supplier=Avnet+Europe, ComponentLink6URL=https://datasheet.ciiva.com/17268/lp12bz11-17268761.pdf?src-supplier=Avnet+Europe, ComponentLink7Description=https://datasheet.ciiva.com/6688/lp12bz11-6688255.pdf?src-supplier=Digi-Key, ComponentLink7URL=https://datasheet.ciiva.com/6688/lp12bz11-6688255.pdf?src-supplier=Digi-Key, ComponentLink8Description=https://datasheet.ciiva.com/4957/lp12bz11-244380-4957957.pdf?src-supplier=Mouser, ComponentLink8URL=https://datasheet.ciiva.com/4957/lp12bz11-244380-4957957.pdf?src-supplier=Mouser, ComponentLink9Description=https://datasheet.ciiva.com/3081/lp12bz11-3081912.pdf?src-supplier=Avnet, ComponentLink9URL=https://datasheet.ciiva.com/3081/lp12bz11-3081912.pdf?src-supplier=Avnet, Contact Plating=Tin, Core Material=Metal,Composite, Depth=3.2mm, Height=2mm, Height - Seated (Max)=0.079inch, Lead Free="Lead Free", Length=3.6mm, Manufacturer Part Number=IHLP1212BZER1R0M11, Max DC Current=5A, Military Standard=Not, Mount="Surface Mount", Number of Pins=2, Packaging="Tape and Reel", Pricing 1="1=1.45000, 10=1.34600, 100=0.97290, 500=0.74520, 1000=0.66240 (USD)", Radiation Hardening=No, REACH SVHC=Unknown, RMS Current (Irms)=5A, RoHS=Yes, Shielding=Shielded, Stock 1=94740, Supplier 1=Digi-Key, Termination=SMD/SMT, Tolerance=20%, Width=0.118inch
Q1: "MOSFET 2N-CH 50V 0.2A EMT6", Continuous Drain Current (ID)=200mA, Drain to Source Voltage (Vdss)=50V, Input Capacitance=26pF, Manufacturer=Rohm, Max Power Dissipation=120mW, Category=MOSFETs, ComponentLink1Description=http://www.mouser.com/ds/2/348/em6k34-515126.pdf?src-supplier=Mouser, ComponentLink1URL=http://www.mouser.com/ds/2/348/em6k34-515126.pdf?src-supplier=Mouser, ComponentLink2Description=http://www.farnell.com/datasheets/2197909.pdf?src-supplier=Farnell, ComponentLink2URL=http://www.farnell.com/datasheets/2197909.pdf?src-supplier=Farnell, ComponentLink3Description=http://rohmfs.rohm.com/en/products/databook/datasheet/discrete/transistor/mosfet/em6k34.pdf?src-supplier=Digi-Key, ComponentLink3URL=http://rohmfs.rohm.com/en/products/databook/datasheet/discrete/transistor/mosfet/em6k34.pdf?src-supplier=Digi-Key, ComponentLink4Description=http://rohmfs.rohm.com/en/products/databook/datasheet/discrete/transistor/mosfet/em6k34.pdf?src-supplier=Avnet, ComponentLink4URL=http://rohmfs.rohm.com/en/products/databook/datasheet/discrete/transistor/mosfet/em6k34.pdf?src-supplier=Avnet, ComponentLink5Description=http://rohmfs.rohm.com/en/techdata_basic/transistor/taping/EMT6_T2R_taping.pdf?src-supplier=Digi-Key, ComponentLink5URL=http://rohmfs.rohm.com/en/techdata_basic/transistor/taping/EMT6_T2R_taping.pdf?src-supplier=Digi-Key, ComponentLink6Description=http://www.farnell.com/datasheets/2197909.pdf?src-supplier=Newark, ComponentLink6URL=http://www.farnell.com/datasheets/2197909.pdf?src-supplier=Newark, FET Type="2 N-Channel", Lead Free="Lead Free", Manufacturer Part Number=EM6K34T2CR, Mount="Surface Mount", Packaging="Tape and Reel", Pricing 1="1=0.35000, 10=0.26400, 25=0.23120, 100=0.12540, 250=0.12476, 500=0.10230, 1000=0.07590, 2500=0.06666 (USD)", Rds On Max=2.2R, RoHS=Yes, Stock 1=17851, Supplier 1=Digi-Key
R1 R2 R3 R4 R5 R6 R7 R8 R9 R10 R11 R12 R13 R14 R15 R16 R17 R18 R19 R20 R21 R22: "General purpose resistor", Package=0402
  R22: Note="NO STUFF"
S1: "Switch Tactile N.O. SPST Button Gull Wing 0.05A 12VDC 1.59N SMD Embossed T/R", Contact Current Rating=50mA, Contact Resistance=100mR, Insulation Resistance=100MR, Manufacturer=Omron, Max Operating Temperature=70°C, Max Voltage Rating (DC)=12V, Min Operating Temperature=-25°C, Operating Force=1.59N, Package Quantity=1, Ratings="Dust Proof", Actuator Length=0.7mm, Category="Tactile Switches", ComponentLink1Description=https://datasheet.ciiva.com/26945/getdatasheetpartid-788439-26945782.pdf?src-supplier=Verical, ComponentLink1URL=https://datasheet.ciiva.com/26945/getdatasheetpartid-788439-26945782.pdf?src-supplier=Verical, ComponentLink2Description=https://datasheet.ciiva.com/1634/60838-1634401.pdf?src-supplier=Farnell, ComponentLink2URL=https://datasheet.ciiva.com/1634/60838-1634401.pdf?src-supplier=Farnell, ComponentLink3Description=https://datasheet.ciiva.com/16861/70176037-16861125.pdf?src-supplier=Allied+Electronics, ComponentLink3URL=https://datasheet.ciiva.com/16861/70176037-16861125.pdf?src-supplier=Allied+Electronics, ComponentLink4Description=https://datasheet.ciiva.com/2900/b3u-1110-2900041.pdf?src-supplier=Digi-Key, ComponentLink4URL=https://datasheet.ciiva.com/2900/b3u-1110-2900041.pdf?src-supplier=Digi-Key, ComponentLink5Description=https://datasheet.ciiva.com/2900/b3u-1110-2900042.pdf?src-supplier=Digi-Key, ComponentLink5URL=https://datasheet.ciiva.com/2900/b3u-1110-2900042.pdf?src-supplier=Digi-Key, ComponentLink6Description=https://datasheet.ciiva.com/1532/60838-1532683.pdf?src-supplier=Element14, ComponentLink6URL=https://datasheet.ciiva.com/1532/60838-1532683.pdf?src-supplier=Element14, ComponentLink7Description=https://datasheet.ciiva.com/22696/60838-22696215.pdf?src-supplier=Element14, ComponentLink7URL=https://datasheet.ciiva.com/22696/60838-22696215.pdf?src-supplier=Element14, ComponentLink8Description=https://datasheet.ciiva.com/2900/b3u-1110-2900043.pdf?src-supplier=Digi-Key, ComponentLink8URL=https://datasheet.ciiva.com/2900/b3u-1110-2900043.pdf?src-supplier=Digi-Key, ComponentLink9Description=https://datasheet.ciiva.com/30119/en-b3u-30119821.pdf?src-supplier=Onlinecomponents.com, ComponentLink9URL=https://datasheet.ciiva.com/30119/en-b3u-30119821.pdf?src-supplier=Onlinecomponents.com, Current Rating=50mA, Depth=3.2mm, Electrical Life=100000Cycles, Height=1.2mm, Illumination Type=Non-Illuminated,Illuminated, Lead Free="Lead Free", Length=4mm, Manufacturer Part Number=B3U-3000P-B, Max Current Rating=50mA, Mechanical Life=100000Cycles, Mount="Surface Mount", Orientation="Right Angle", Packaging="Tape and Reel", Pricing 1="1=0.98000, 10=0.94300, 25=0.88120, 100=0.76500, 250=0.69612, 500=0.64536, 1000=0.59822 (USD)", Radiation Hardening=No, REACH SVHC="No SVHC", RoHS=Yes, Stock 1=25144, Supplier 1=Digi-Key, Switch Function=Off-Mom, Switch Travel=0.2mm, Termination=SMD/SMT, Throw Configuration=SPST, Voltage Rating (DC)=12V, Weight=0.000776oz, Width=3mm
S2: "OMRON ELECTRONIC COMPONENTS         B3U-1000P            SWITCH, SPST-NO, 0.05A, 12V, SMD", Contact Current Rating=50mA, Contact Resistance=100mR, Insulation Resistance=100MR, Manufacturer=Omron, Max Operating Temperature=70°C, Max Voltage Rating (DC)=12V, Min Operating Temperature=-25°C, Operating Force=1.5N, Package Quantity=1, Ratings="Dust Proof,IP40", Actuator Length=0.4mm, Actuator Type=Standard, ComponentLink1Description=https://datasheet.ciiva.com/26917/getdatasheetpartid-552554-26917552.pdf?src-supplier=Verical, ComponentLink1URL=https://datasheet.ciiva.com/26917/getdatasheetpartid-552554-26917552.pdf?src-supplier=Verical, ComponentLink2Description=https://datasheet.ciiva.com/22696/1685550-22696214.pdf?src-supplier=Element14, ComponentLink2URL=https://datasheet.ciiva.com/22696/1685550-22696214.pdf?src-supplier=Element14, ComponentLink3Description=https://datasheet.ciiva.com/1532/1685550-1532680.pdf?src-supplier=Element14, ComponentLink3URL=https://datasheet.ciiva.com/1532/1685550-1532680.pdf?src-supplier=Element14, ComponentLink4Description=https://datasheet.ciiva.com/1634/1685550-1634396.pdf?src-supplier=Farnell, ComponentLink4URL=https://datasheet.ciiva.com/1634/1685550-1634396.pdf?src-supplier=Farnell, ComponentLink5Description=https://datasheet.ciiva.com/14142/b3u-eng-datasheet-14142540.pdf?src-supplier=Distrelec, ComponentLink5URL=https://datasheet.ciiva.com/14142/b3u-eng-datasheet-14142540.pdf?src-supplier=Distrelec, ComponentLink6Description=https://datasheet.ciiva.com/2900/b3u-1110-2900029.pdf?src-supplier=Digi-Key, ComponentLink6URL=https://datasheet.ciiva.com/2900/b3u-1110-2900029.pdf?src-supplier=Digi-Key, ComponentLink7Description=https://datasheet.ciiva.com/16155/en-b3u-16155021.pdf?src-supplier=Onlinecomponents.com, ComponentLink7URL=https://datasheet.ciiva.com/16155/en-b3u-16155021.pdf?src-supplier=Onlinecomponents.com, ComponentLink8Description=https://datasheet.ciiva.com/2900/b3u-1110-2900030.pdf?src-supplier=Digi-Key, ComponentLink8URL=https://datasheet.ciiva.com/2900/b3u-1110-2900030.pdf?src-supplier=Digi-Key, ComponentLink9Description=https://datasheet.ciiva.com/16862/70176037-16862846.pdf?src-supplier=Allied+Electronics, ComponentLink9URL=https://datasheet.ciiva.com/16862/70176037-16862846.pdf?src-supplier=Allied+Electronics, ComponentLink10Description=https://datasheet.ciiva.com/2900/b3u-1110-2900031.pdf?src-supplier=Digi-Key, ComponentLink10URL=https://datasheet.ciiva.com/2900/b3u-1110-2900031.pdf?src-supplier=Digi-Key, Contact Material=Silver, Current Rating=50mA, Depth=2.5mm, Electrical Life=200000Cycles, Height=1.2mm, Illumination Type=Non-Illuminated,Illuminated, Lead Free="Lead Free", Length=4mm, Manufacturer Part Number=B3U-1000P, Max Current Rating=50mA, Mechanical Life=200000Cycles, Mount="Surface Mount", Orientation=Straight, Packaging="Tape and Reel", Pricing 1="1=0.84000, 10=0.80700, 25=0.76080, 50=0.66960, 100=0.60880, 250=0.57836, 500=0.56312, 1000=0.44137 (USD)", REACH SVHC=Unknown, RoHS=Yes, Stock 1=38234, Supplier 1=Digi-Key, Switch Function=Off-Mom, Switch Travel=0.15mm, Termination=SMD/SMT, Throw Configuration=SPST, Voltage Rating (DC)=12V, Weight=0.000776oz, Width=3mm
U1: "IC LI+ CHARGER PWR MGMT 24VQFN", Battery Pack Voltage=4.4V, Case/Package=VQFN, Manufacturer="Texas Instruments", Max Charge Current=4.5A, Max Operating Temperature=85°C, Max Supply Voltage=17V, Min Operating Temperature=-40°C, Min Supply Voltage=3.9V, Operating Supply Current=3A, Package Quantity=3000, Switching Frequency=1.5MHz, Category="Battery Management", ComponentLink1Description=https://datasheet.ciiva.com/18617/bq24292i-18617578.pdf?src-supplier=Digi-Key, ComponentLink1URL=https://datasheet.ciiva.com/18617/bq24292i-18617578.pdf?src-supplier=Digi-Key, Contact Plating=Gold, Fault Protection="Over Current,Over Voltage,Over Temperature", Interface=I2C, Lead Free="Lead Free", Manufacturer Part Number=BQ24292IRGER, Mount="Surface Mount", Number of Cells=1, Number of Pins=24, Output Current=4.5A, Output Voltage=4.4V, Packaging="Tape and Reel", Pricing 1="1=5.71000, 10=5.13100, 25=4.85120, 100=3.98860, 250=3.57896, 500=3.44960, 1000=2.86748 (USD)", RoHS=Yes, Stock 1=2820, Supplier 1=Digi-Key
U2 U3 U5 U7: "Conv DC-DC Single Step Down 3V to 17V 16-Pin QFN T/R", Case/Package=QFN, Manufacturer="Texas Instruments", Max Input Voltage=17V, Max Operating Temperature=125°C, Max Output Current=3A, Max Output Voltage=6V, Min Input Voltage=3V, Min Operating Temperature=-40°C, Min Output Voltage=900mV, Package Quantity=3000, Quiescent Current=17uA, Switching Frequency=2.5MHz, Category="Power Supply Modules", ComponentLink1Description=https://datasheet.ciiva.com/14377/tps62130-14377120.pdf?src-supplier=Digi-Key, ComponentLink1URL=https://datasheet.ciiva.com/14377/tps62130-14377120.pdf?src-supplier=Digi-Key, ComponentLink2Description=https://datasheet.ciiva.com/46638/tps62130a-46638750.pdf?src-supplier=Digi-Key, ComponentLink2URL=https://datasheet.ciiva.com/46638/tps62130a-46638750.pdf?src-supplier=Digi-Key, ComponentLink3Description=https://datasheet.ciiva.com/30031/tps62130-30031567.pdf?src-supplier=Avnet, ComponentLink3URL=https://datasheet.ciiva.com/30031/tps62130-30031567.pdf?src-supplier=Avnet, Contact Plating=Gold, Lead Free="Lead Free", Manufacturer Part Number=TPS62130ARGTR, Min Supply Voltage=3V, Mount="Surface Mount", Number of Outputs=1, Number of Pins=16, Operating Supply Voltage=17V, Output Configuration=Positive, Output Current=3A, Output Type=Adjustable, Output Voltage=6V, Packaging="Tape and Reel", Pricing 1="1=2.08000, 10=1.86600, 25=1.76000, 100=1.40800, 250=1.23200, 500=1.19680, 1000=0.95040 (USD)", Radiation Hardening=No, REACH SVHC="No SVHC", RoHS=Yes, Stock 1=19781, Supplier 1=Digi-Key, Synchronous Rectifier=Yes
U4: "IC FUEL GAUGE LI-ION 1CELL 8TDFN", Manufacturer=Maxim, Max Operating Temperature=85°C, Min Operating Temperature=-20°C, Operating Supply Current=23uA, Operating Supply Voltage=4.5V, Output Voltage=400mV, Package Quantity=10000, Category="Battery Management", ComponentLink1Description=https://datasheet.ciiva.com/14083/max17048-max17049-14083973.pdf?src-supplier=Digi-Key, ComponentLink1URL=https://datasheet.ciiva.com/14083/max17048-max17049-14083973.pdf?src-supplier=Digi-Key, Contact Plating=Tin,Matte, Manufacturer Part Number=MAX17048G+T10, Mount="Surface Mount", Number of Pins=8, Packaging="Tape and Reel", Pricing 1="1=2.14000, 10=1.92300, 25=1.81800, 100=1.49480, 250=1.34128, 500=1.31300 (USD)", Radiation Hardening=No, RoHS=Yes, Stock 1=3057, Supplier 1=Digi-Key
U6: "MCU 32-Bit ARM Cortex-M4 RISC 128KB Flash 1.71V to 3.6V 32-Pin UFQFPN", Manufacturer=STMicroelectronics, Manufacturer Part Number=STM32G431KBU6, Pricing 1="1=4.44000, 10=3.99100, 25=3.77320, 100=3.27000, 250=3.10228, 500=2.78366, 1000=2.34766, 2500=2.23028, 5000=2.14643 (USD)", RoHS=No, Stock 1=2759, Supplier 1=Digi-Key
U8: "IC REG BOOST 5V 4A 10VSON", Manufacturer="Texas Instruments", Max Input Voltage=5.5V, Max Operating Temperature=85°C, Max Output Current=2.1A, Min Input Voltage=2.3V, Min Operating Temperature=-40°C, Output Voltage=5V, Quiescent Current=35uA, Switching Frequency=2MHz, Category="Power Supply Modules", ComponentLink1Description=http://www.ti.com/lit/ds/symlink/tps61232.pdf?src-supplier=Digi-Key, ComponentLink1URL=http://www.ti.com/lit/ds/symlink/tps61232.pdf?src-supplier=Digi-Key, ComponentLink2Description=http://www.ti.com/general/docs/suppproductinfo.tsp?distId=10&amp;gotoUrl=http%3A%2F%2Fwww.ti.com%2Flit%2Fgpn%2Ftps61232&src-supplier=Digi-Key, ComponentLink2URL=http://www.ti.com/general/docs/suppproductinfo.tsp?distId=10&amp;gotoUrl=http%3A%2F%2Fwww.ti.com%2Flit%2Fgpn%2Ftps61232&src-supplier=Digi-Key, Contact Plating=Gold, Efficiency=96%, Lead Free="Lead Free", Manufacturer Part Number=TPS61232DRCR, Mount="Surface Mount", Number of Outputs=1, Number of Pins=10, Operating Supply Voltage=5.5V, Output Type=Fixed, Pricing 1="1=2.47000, 10=2.21500, 25=2.09000, 100=1.67200, 250=1.46300, 500=1.42120, 1000=1.12860 (USD)", RoHS=Yes, Stock 1=1050, Supplier 1=Digi-Key, Topology=Boost
U9: "IC REG LINEAR 3.3V 500MA SOT23-5", Manufacturer="Texas Instruments", Max Operating Temperature=125°C, Min Operating Temperature=-40°C, ComponentLink1Description=http://www.ti.com/lit/ds/symlink/tlv755p.pdf?src-supplier=Digi-Key, ComponentLink1URL=http://www.ti.com/lit/ds/symlink/tlv755p.pdf?src-supplier=Digi-Key, Manufacturer Part Number=TLV75533PDBVR, Pricing 1="1=0.63000, 10=0.55100, 100=0.39250, 500=0.31730, 1000=0.24215 (USD)", RoHS=No, Stock 1=25120, Supplier 1=Digi-Key

## Free pads (board coordinates)
  round 2.25 hole 2.25 unplated: ""(12.05,25.6) ""(12.05,88.05) ""(31.85,25.6) ""(31.85,80.2)

## Via types
v1: diameter 0.508, hole 0.254, Top Layer to Bottom Layer, tented both sides, 184 vias
v2: diameter 0.381, hole 0.2, Top Layer to Bottom Layer, tented both sides, 32 vias
v3: diameter 0.45, hole 0.2, Top Layer to Bottom Layer, tented both sides, 2 vias

## Nets (pads, with @x,y where several pads share a name; then routed paths per layer and width w, separated by ;. In a path a pad name is that pad's centre, name@x,y a point inside that pad or via, vN(x,y) a via of type N, cw(c..) or ccw(c..) an arc to the next point about the centre after c; other vN are vias at no path point)
1V0: C34.2 J4.8 J4.9 J4.11 J4.12 L5.2 R12.2 U7.14 | length 20.6